# Altium PCB PCB1.PcbDoc
Units mm, origin at the board's own origin, x right, y up, seen from the top; angles counter-clockwise.
Board outline 55 x 50 mm, 2 copper layers (Top Layer, Bottom Layer); 38 components, 34 nets, 233 pads, 323 vias.
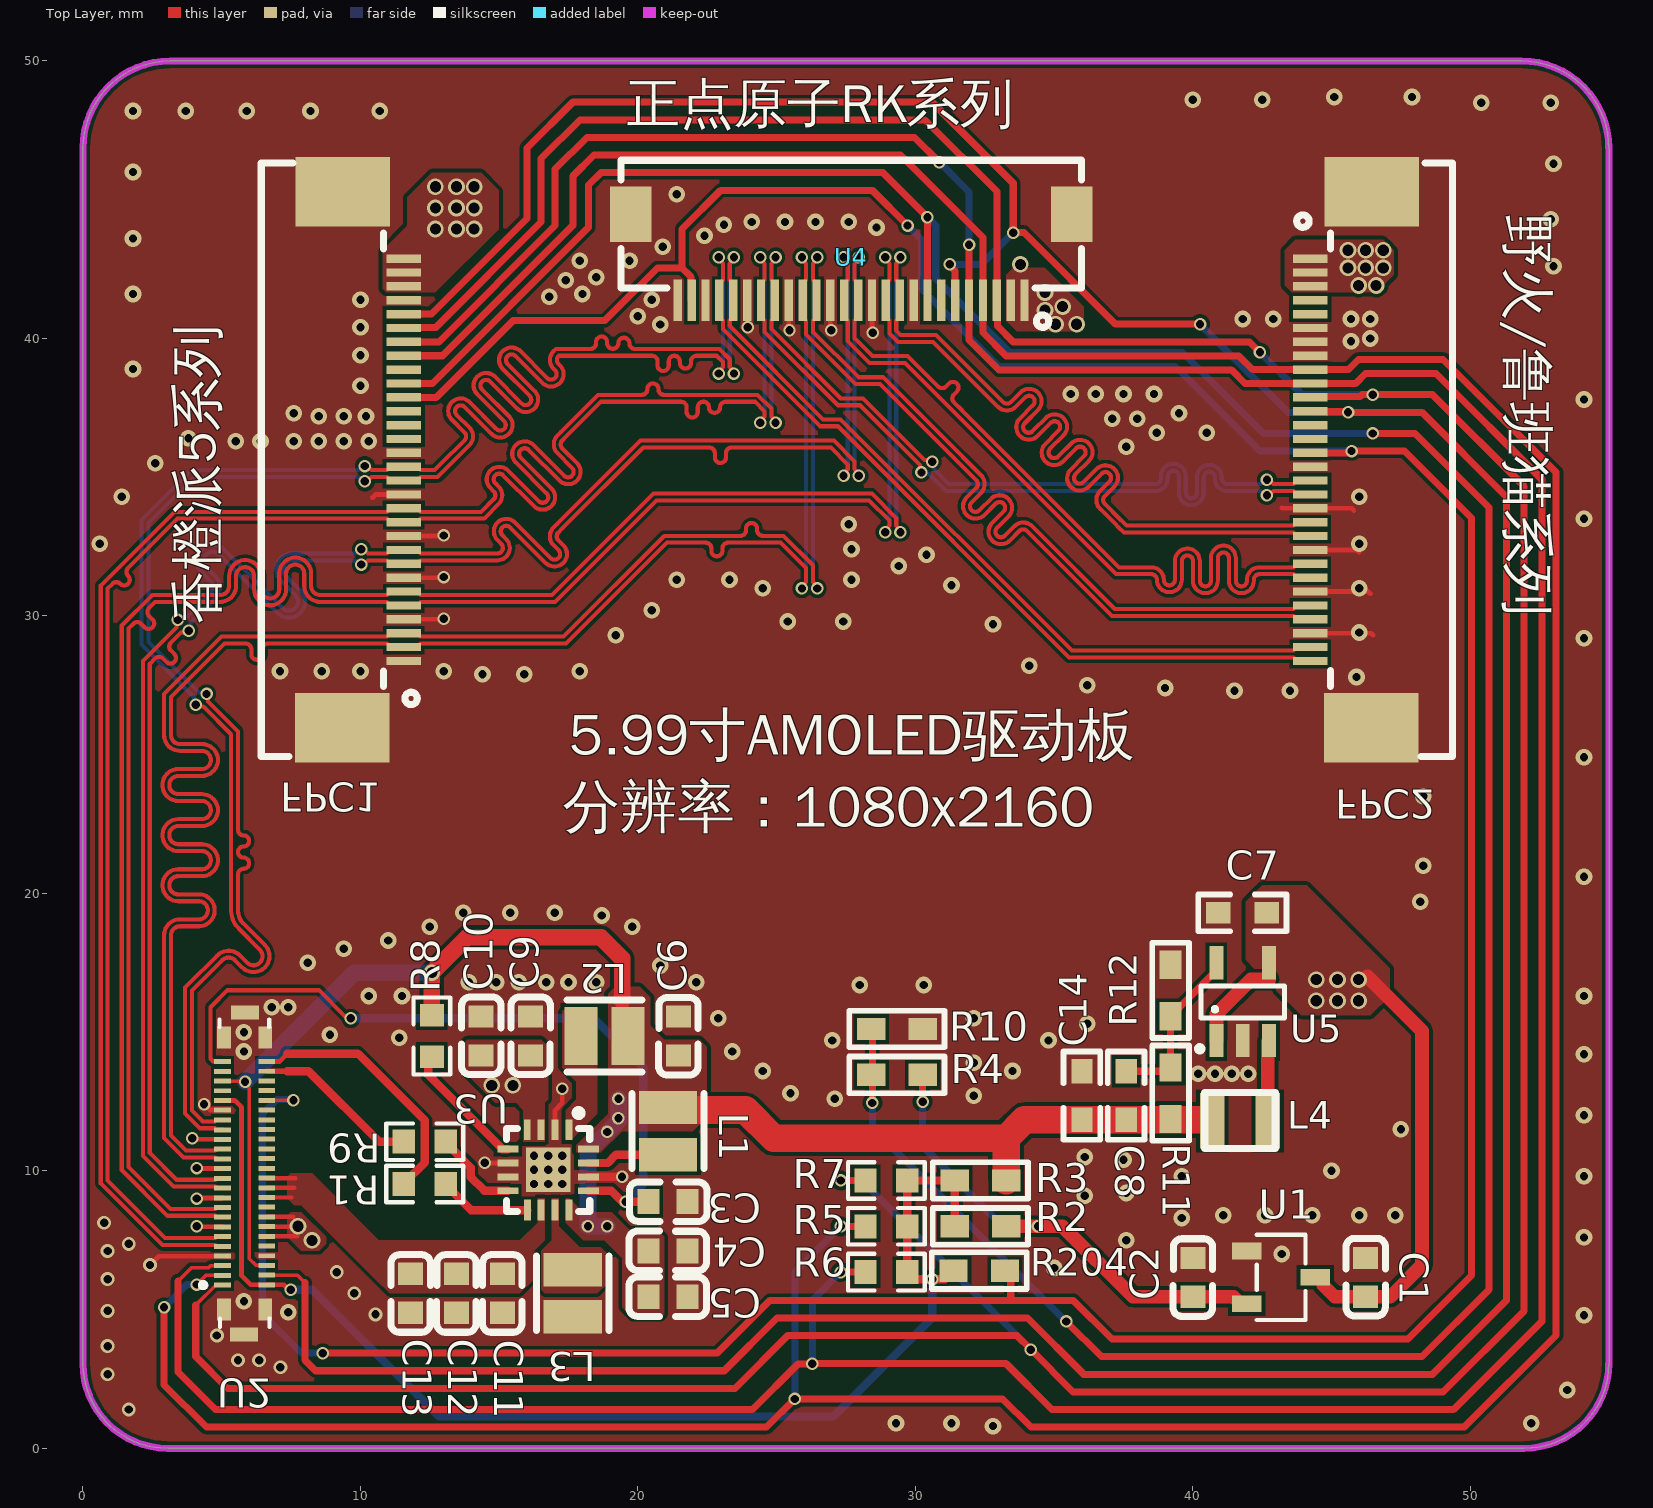
[diagram p0: Top Layer view]
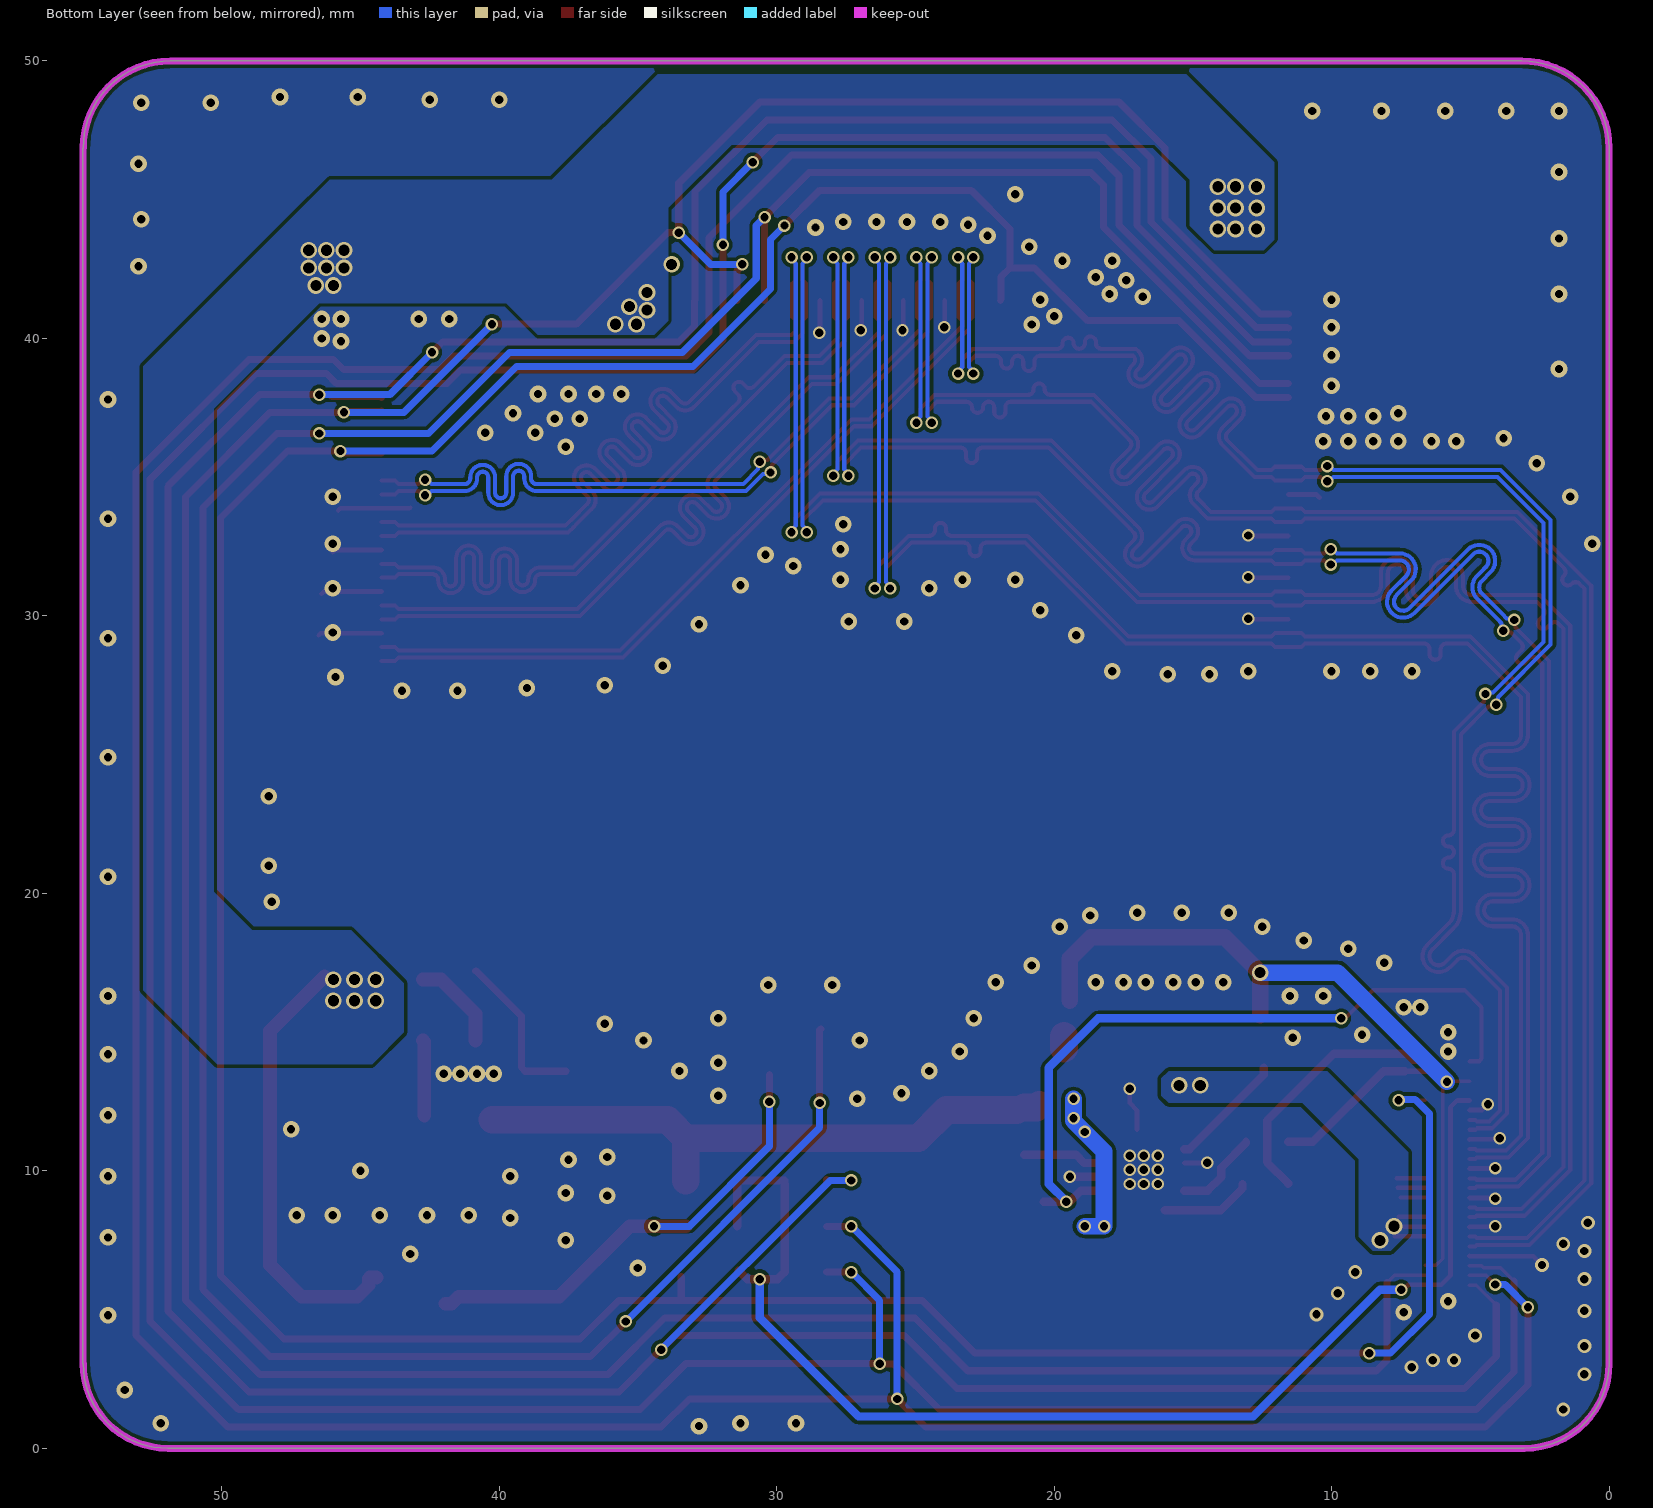
[diagram p1: Bottom Layer view, seen from below]

## Layer stack, top to bottom
Top Solder: solder mask 0.0102, Solder Resist, Dk 3.5
Top Layer: signal copper 0.0356
Dielectric 1: dielectric 0.32, FR-4, Dk 4.8
Bottom Layer: signal copper 0.0356
Bottom Solder: solder mask 0.0102, Solder Resist, Dk 3.5

## Board outline
0,3.048 ccw(c3.048,3.048) 3.048,0 51.943,0 ccw(c51.943,3.048) 54.991,3.048 55,3.048 55,46.863 54.991,46.863 ccw(c51.854,46.863) 51.854,50 3.137,50 ccw(c3.137,46.863) 0,46.863

## Design rules (kind name [scope] priority, off if disabled: settings)
Clearance Clearance_1 [InNetClass('100moh-mipi') vs InNet('GND')] p1: gap=0.3 ignorepadtopadclearanceinfootprint=FALSE
Clearance [All] p2: gap=0.127 ignorepadtopadclearanceinfootprint=FALSE
DiffPairsRouting [InDifferentialPairClass('mipi_100ohm')] p1: maxlimit=0.254 minlimit=0.101 mostfreqgap=0.101 toplayer_minwidth=0.147 toplayer_maxwidth=0.147 toplayer_prefwidth=0.147 bottomlayer_minwidth=0.147 bottomlayer_maxwidth=0.147 bottomlayer_prefwidth=0.147 maxuncoupledlength=12.7
PolygonConnect [All] p1: connectstyle=Direct reliefconductorwidth=0.254 reliefentries=4 polygonreliefangle="90 Angle" airgapwidth=0.254
RoutingVias [All] p1: holewidth=0.3 width=0.45 viastyle="Through Hole" minholewidth=0.3 minwidth=0.45 maxholewidth=0.3 maxwidth=0.45
ShortCircuit [All] p1: allowed=TRUE
SolderMaskExpansion [All] p1: expansion=0.102 istentingtop=FALSE
Width [All] p1: maxlimit=2 minlimit=0.127 preferedwidth=0.4
28 further rules are at their usual default settings.

## Components (designator, comment, footprint, x,y, rotation, side; value= is the part's Value field where it differs from the comment)
C1 "1uf" C0603 46.228,6.161 r270 top
C2 "1uf" C0603 40.005,6.161 r90 top
C3 "10uF" C0603 21.082,8.89 r180 top
C4 "10uF" C0603 21.082,7.112 r0 top
C5 "10uF" C0603 21.082,5.461 r0 top
C6 "10uF" C0603 21.463,14.859 r90 top
C7 "10uF (106)" "C 0603" 41.8,19.3 r0 top
C8 "10pF" "C 0603" 37.6,12.7 r270 top
C9 "10uF" C0603 16.129,14.859 r270 top
C10 "10uF" C0603 14.351,14.859 r270 top
C11 "10uF" C0603 15.113,5.588 r90 top
C12 "10uF" C0603 13.462,5.588 r90 top
C13 "10uF" C0603 11.811,5.588 r90 top
C14 "10uF" "C 0603" 36,12.7 r270 top
FPC1 "0.5TBQP-30P-1" FPC-SMD_30P-P0.50_0.5TBQS-30P-1 10.453,35.627 r90 top
FPC2 "0.5TBQP-30P-1" FPC-SMD_30P-P0.50_0.5TBQS-30P-1 45.339,35.627 r270 top
L1 "10uH" IND-SMD_L2.7-W2.0 21.082,11.43 r90 top
L2 "4.7uH" IND-SMD_L2.7-W2.0 18.796,14.859 r180 top
L3 "4.7uH" IND-SMD_L2.7-W2.0 17.653,5.588 r270 top
L4 "3.3uH/1.7A" 1008 41.7,11.8 r180 top
R1 "0R" R0603 12.319,9.525 r0 top
R2 "NC" "R 0603" 32.347,8.001 r180 top
R3 "0R" "R 0603" 32.347,9.652 r180 top
R4 "4.7K" "R 0603" 29.337,13.462 r180 top
R5 "NC/2.2K" R0603 28.956,8.001 r0 top
R6 "NC/2.2K" R0603 28.956,6.35 r0 top
R7 "4.7k" R0603 28.956,9.652 r0 top
R8 "10k" R0603 12.573,14.859 r270 top
R9 "0R" R0603 12.319,11.049 r0 top
R10 "10K" "R 0603" 29.337,15.113 r180 top
R11 "150KΩ" "R 0603" 39.2,12.8 r270 top
R12 "33KΩ (3302) ±1%" "R 0603" 39.2,16.5 r270 top
R204 "4.7K" "R 0603" 32.3,6.4 r180 top
U1 "XC6206P182MR(1uA)" SOT-23-3_L2.9-W1.6-P1.90-LS2.8-BR 43.18,6.161 r180 top
U2 "24-5857-048-201-829+" BTB-24-5857-048 5.842,9.906 r270 top
U3 "SGM3836AYTQ16G/TR" TQFN-16_L3.0-W3.0-P0.50-BL-EP1.7 16.764,10.033 r180 top
U4 "FPC-26P-0.5前插后压上下接" FPC-SMD_26P-P0.50_C9900017209 27.686,42.926 r0 top
U5 "SY8088AAC" SOT23-5N 41.8,16.1 r0 top

## Footprints (in the part's own frame and the unit in brackets; to place one, negate y for a bottom-side part, rotate by r counter-clockwise, add the part's x,y. Pads: shape width x height; smd on the part's side, far side on the other; paste and mask are expansions set on the pad)
1008 [mm]
  rect 0.9x2 smd: 1(-1,0) 2(1,0)
  silkscreen extent -1.27,-1.02 1.27,1
BTB-24-5857-048 [mm]
  rect 0.18x0.6 smd: 1(4.027,-0.814) 2(3.677,-0.814) 3(3.327,-0.814) 4(2.977,-0.814) 5(2.627,-0.814) 6(2.277,-0.814) 7(1.927,-0.814) 8(1.577,-0.814) 9(1.227,-0.814) 10(0.877,-0.814) 11(0.527,-0.814) 12(0.177,-0.814) 13(-0.173,-0.814) 14(-0.523,-0.814) 15(-0.873,-0.814) 16(-1.223,-0.814) 17(-1.573,-0.814) 18(-1.93,-0.814) 19(-2.28,-0.814) 20(-2.63,-0.814) 21(-2.98,-0.814) 22(-3.33,-0.814) 23(-3.68,-0.814) 24(-4.03,-0.814) 25(-4.033,0.776) 26(-3.683,0.776) 27(-3.333,0.776) 28(-2.983,0.776) 29(-2.633,0.776) 30(-2.283,0.776) 31(-1.933,0.776) 32(-1.583,0.776) 33(-1.233,0.776) 34(-0.883,0.776) 35(-0.533,0.776) 36(-0.183,0.776) 37(0.167,0.776) 38(0.517,0.776) 39(0.867,0.776) 40(1.217,0.776) 41(1.567,0.776) 42(1.917,0.776) 43(2.267,0.776) 44(2.617,0.776) 45(2.967,0.776) 46(3.317,0.776) 47(3.667,0.776) 48(4.017,0.776)
  rect 0.8x0.5 smd: 49(-4.9,0.726) 50(-4.9,-0.764) 51(4.9,-0.764) 52(4.9,0.726)
  rect 0.5x1 smd: 53(-5.8,0) 54(5.8,-0.038)
  silkscreen extent -5.55,-1.6 5.53,0.88
C0603 [mm]
  rect 0.8x0.9 smd paste+0 mask+0.051: 1(-0.7,0) 2(0.7,0)
  silkscreen extent -1.41,-0.71 1.39,0.72
"C 0603" [mil] "无极性贴片电容"
  rect 35x30 smd: 1(-35,0) 2(34,0)
  silkscreen extent -63,-26 62,26, body extent -31,-16 31,16, height 32
FPC-SMD_26P-P0.50_C9900017209 [mm]
  rect 0.3x1.5 smd paste+0 mask+0.05: 1(6.25,-1.552) 2(5.75,-1.552) 3(5.25,-1.552) 4(4.75,-1.552) 5(4.25,-1.552) 6(3.75,-1.552) 7(3.25,-1.552) 8(2.75,-1.552) 9(2.25,-1.552) 10(1.75,-1.552) 11(1.25,-1.552) 12(0.75,-1.552) 13(0.25,-1.552) 14(-0.25,-1.552) 15(-0.75,-1.552) 16(-1.25,-1.552) 17(-1.75,-1.552) 18(-2.25,-1.552) 19(-2.75,-1.552) 20(-3.25,-1.552) 21(-3.75,-1.552) 22(-4.25,-1.552) 23(-4.75,-1.552) 24(-5.25,-1.552) 25(-5.75,-1.552) 26(-6.25,-1.552)
  rect 1.5x2 smd paste+0 mask+0.05: 27(-7.95,1.552) 28(7.95,1.552)
  silkscreen extent -8.3,-2.53 8.3,3.5
FPC-SMD_30P-P0.50_0.5TBQS-30P-1 [mm]
  rect 0.3x1.25 smd: 1(-7.25,-1.104) 2(-6.75,-1.104) 3(-6.25,-1.104) 4(-5.75,-1.104) 5(-5.25,-1.104) 6(-4.75,-1.104) 7(-4.25,-1.104) 8(-3.75,-1.104) 9(-3.25,-1.104) 10(-2.75,-1.104) 11(-2.25,-1.104) 12(-1.75,-1.104) 13(-1.25,-1.104) 14(-0.75,-1.104) 15(-0.25,-1.104) 16(0.25,-1.104) 17(0.75,-1.104) 18(1.25,-1.104) 19(1.75,-1.104) 20(2.25,-1.104) 21(2.75,-1.104) 22(3.25,-1.104) 23(3.75,-1.104) 24(4.25,-1.104) 25(4.75,-1.104) 26(5.25,-1.104) 27(5.75,-1.104) 28(6.25,-1.104) 29(6.75,-1.104) 30(7.25,-1.104)
  rect 2.5x3.4 smd: 31(9.655,1.088) 32(-9.655,1.104)
  silkscreen extent -10.7,-1.6 10.7,4.03
IND-SMD_L2.7-W2.0 [mm]
  rect 1.2x2.1 smd: 1(-0.85,0) 2(0.85,0)
  silkscreen extent -1.35,-1.3 1.35,1.3
R0603 [mm]
  rect 0.806x0.864 smd paste-100 mask+0.051: 1(-0.753,0) 2(0.753,0)
  silkscreen extent -1.39,-0.66 1.39,0.66
"R 0603" [mil] "1/10W贴片电阻"
  rect 40x31.5 smd: 1(-36.5,0) 2(36.5,0)
  silkscreen extent -68,-26 68,26, body extent -31,-16 32,16, height 16
SOT23-5N [mm] "3x1.6x1.1mm(长宽高)"
  rect 0.5x1.2 smd: 1(-0.95,-1.4) 2(0,-1.4) 3(0.95,-1.4) 4(0.95,1.4) 5(-0.95,1.4)
  silkscreen extent -1.63,-1.78 1.5,0.56, body extent -1.5,-1.4 1.5,1.4, height 1.15
SOT-23-3_L2.9-W1.6-P1.90-LS2.8-BR [mm]
  rect 1.07x0.6 smd paste+0 mask+0.051: 1(1.235,-0.95) 2(1.235,0.95) 3(-1.235,0)
  silkscreen extent -0.88,-1.54 0.88,1.54
TQFN-16_L3.0-W3.0-P0.50-BL-EP1.7 [mm]
  rect 0.25x0.75 smd paste-100 mask+0.051: 1(-0.748,-1.45) 2(-0.249,-1.45) 3(0.252,-1.45) 4(0.751,-1.45) 9(0.75,1.45) 10(0.25,1.45) 11(-0.25,1.45) 12(-0.749,1.45)
  rect 0.75x0.25 smd paste-100 mask+0.051: 5(1.45,-0.75) 6(1.45,-0.25) 7(1.45,0.25) 8(1.45,0.75) 13(-1.45,0.75) 14(-1.45,0.25) 15(-1.45,-0.25) 16(-1.45,-0.75)
  rect 1.6x1.6 smd paste-100 mask+0.051: 17(0,0)
  silkscreen extent -1.5,-2.17 1.5,1.5

## Part data
C1 C2 C3 C4 C5 C6 C9 C10 C11 C12 C13: library part CAP_0603, Add into BOM=yes, Convert to PCB=yes, Device=CAP_0603, Supplier Footprint=0603, Symbol=CapAcitance
  C1 C2: Name=1uf
  C3 C4 C5 C6 C9 C10 C11 C12 C13: Name=10uF
C7 C14: library part "0603 10uF (106) 10% 10V", "贴片电容", Package=0603, SuppliersPartNumber=C19702, ComponentLink1Description=供应商链接, ComponentLink1URL=http://www.szlcsc.com/product/details_20411.html, Supplier=LC
C8: library part "0402 10pF (100) 5% 50V", "贴片电容", Package=0402, SuppliersPartNumber=C32949, ComponentLink1Description=供应商链接, ComponentLink1URL=http://www.szlcsc.com/product/details_33914.html, Supplier=LC
FPC1 FPC2 U4: JLCPCB Part Class=扩展库, Add into BOM=yes, Convert to PCB=yes, Supplier=LCSC
  FPC1 FPC2: Device=0.5TBQP-30P-1, LCSC Part Name=0.5TBQP-30P-1, Manufacturer Part=0.5TBQP-30P-1, Name=0.5TBQP-30P-1, Supplier Footprint=FPC-30P-0.5mm, Supplier Part=C3975120, Symbol=0.5TBQP-30P-1
  U4: Device=FPC-26P-0.5前插后压上下接, LCSC Part Name=FPC-26P-0.5前插后压上下接, Manufacturer Part=FPC-26P-0.5前插后压上下接, Name=FPC-26P-0.5前插后压上下接, Supplier Footprint=FPC26-0_5, Supplier Part=C9900017209, Symbol=FPC-26P-0.5前插后压上下接
L1 L2 L3: library part GNR2512PA-2R2M, "电感值:2.2uH;精度:±20%;额定电流:1.3A;", DC Resistance (DCR)=155mΩ, JLCPCB Part Class=扩展库, LCSC Part Name="2.2uH ±20%", Manufacturer=gotrend(高创科技), Rated Current=1.3A, Tolerance=±20%, Add into BOM=yes, Convert to PCB=yes, Datasheet=https://atta.szlcsc.com/upload/public/pdf/source/20171113/C142411_15105615305361115979.pdf, Device=GNR2512PA-2R2M, Manufacturer Part=GNR2512PA-2R2M, Supplier=LCSC, Supplier Footprint=SMD,2.7x2.2x1.2mm, Supplier Part=C142404, Symbol=GNR2512PA-2R2M
  L1: Name=10uH
  L2 L3: Name=4.7uH
L4: library part Inductor, "电感"
R1 R5 R6 R7 R8 R9: library part Res_0603, Add into BOM=yes, Convert to PCB=yes, Device=Res_0603, Supplier Footprint=0603, Symbol=电阻
  R1 R9: Name=0R
  R5 R6: Name=NC/2.2K
  R7: Name=4.7k
  R8: Name=10k
R2 R3 R4 R10 R204: library part R, "贴片电阻", BOM名称=贴片电阻, 学习资源=www.ooocke.com, 版权归属=源创客
R11: library part "0402 150KΩ (1503) 1%", "贴片电阻", Package=0402, SuppliersPartNumber=C25755, ComponentLink1Description=供应商链接, ComponentLink1URL=http://www.szlcsc.com/product/details_26498.html, Supplier=LC
R12: library part "0402 33KΩ (3302) 1%", "贴片电阻", Package=0402, SuppliersPartNumber=C25779, ComponentLink1Description=供应商链接, ComponentLink1URL=http://www.szlcsc.com/product/details_26522.html, Supplier=LC
U1: "输出类型:-;", JLCPCB Part Class="Extended Part", Manufacturer="TECH PUBLIC(台舟)", Add into BOM=yes, Convert to PCB=yes, Datasheet=https://atta.szlcsc.com/upload/public/pdf/source/20210427/C2827651_CB3194A7C09679308DE708B038C8109A.pdf, Device=XC6206P182MR(1uA), LCSC Part Name=XC6206P182MR(1uA), Manufacturer Part=XC6206P182MR(1uA), Name=XC6206P182MR(1uA), Output Type=-, Supplier=LCSC, Supplier Footprint=SOT-23-3L, Supplier Part=C2827651, Symbol=XC6206P182MR(1UA)
U3: JLCPCB Part Class=扩展库, Manufacturer=SGMICRO(圣邦微), Add into BOM=yes, Convert to PCB=yes, Device=SGM3836AYTQ16G/TR, LCSC Part Name=SGM3836AYTQ16G/TR, Manufacturer Part=SGM3836AYTQ16G/TR, Name=SGM3836AYTQ16G/TR, Supplier=LCSC, Supplier Footprint=TQFN-16-EP(3x3), Supplier Part=C699665, Symbol=SGM3836AYTQ16G/TR
U5: "1.5M 1A DCDC"
U2: Add into BOM=yes, Convert to PCB=yes, Device=24-5857-048-201-829+, Symbol=24-5857-048

## Via types
v1: diameter 0.6, hole 0.3, Top Layer to Bottom Layer, tented both sides, 181 vias
v2: diameter 0.45, hole 0.3, Top Layer to Bottom Layer, tented both sides, 92 vias
v3: diameter 0.6, hole 0.4, Top Layer to Bottom Layer, tented both sides, 34 vias
v4: diameter 0.5, hole 0.3, Top Layer to Bottom Layer, tented both sides, 16 vias

## Nets (pads, with @x,y where several pads share a name; then routed paths per layer and width w, separated by ;. In a path a pad name is that pad's centre, name@x,y a point inside that pad or via, vN(x,y) a via of type N, cw(c..) or ccw(c..) an arc to the next point about the centre after c; other vN are vias at no path point)
1V8: C2.1 R2.1 R4.1 U1.2 | length 17.8
  Top Layer w0.254: v2(30.264,12.484) R4.1
  Top Layer w0.5: R2.1 v2(34.417,8.001) 35.306,8.001 37.846,5.461 C2.1 41.46,5.461 41.71,5.211 U1.2
  Bottom Layer w0.254: v2(30.264,12.484) 30.264,10.884 33.147,8.001 v2(34.417,8.001)
AVDD_6.8V: C3.2 U2.24 U3.13 | length 26.8
  Top Layer w0.15: U2.24 5.013,13.951 4.679,13.951 4.591,14.039 4.591,15.894 5.207,16.51 8.509,16.51 9.468,15.551 9.513,15.551 9.652,15.413 v2@9.652,15.367
  Top Layer w0.3: U3.13 19.038,9.283 19.431,8.89 v2(19.558,8.89) C3.2
  Bottom Layer w0.3: v2(9.652,15.494) 18.415,15.494 20.193,13.716 20.193,9.525 v2(19.558,8.89)
AVDD_EN: R9.1 U2.26 | length 6
  Top Layer w0.2: U2.26 7.366,13.589
  Top Layer w0.3: 7.366,13.589 8.128,13.589 10.668,11.049 R9.1
DSI-CLKN: FPC1.8 FPC2.24 U2.12 U4.14 | length 96.8
  Top Layer w0.147: v2(3.81,29.464) 3.752,29.406 3.538,29.406 3.386,29.253 3.166,29.034 ccw(c3.308,28.892) 3.166,28.75 3.292,28.624 cw(c3.15,28.482) 3.292,28.34 cw(c3.15,28.482) 3.009,28.34 2.883,28.467 ccw(c2.741,28.325) 2.599,28.467 2.407,28.275 2.407,28.129 2.407,10.644 3.373,9.678 4.767,9.678 4.818,9.729 U2.12 ; v2(10.033,31.852) 10.115,31.852 10.266,32.003 10.956,32.003 11.082,31.877 FPC1.8 12.032,31.877 12.158,32.003 13.844,32.003 14.935,32.003 ccw(c14.935,32.452) 15.288,32.728 15.288,32.732 15.252,32.768 ; 15.252,32.769 15.113,32.907 cw(c15.255,33.049) 15.114,33.19 cw(c15.255,33.049) 15.398,33.19 16.677,31.911 ccw(c16.995,32.227) 17.311,31.909 17.312,31.91 ccw(c16.995,32.227) 17.348,32.503 17.348,32.508 17.132,32.724 cw(c17.274,32.866) 17.132,33.007 17.272,33.147 20.193,36.068 22.098,36.068 22.573,36.068 cw(c22.573,35.868) 22.773,35.868 22.773,35.713 ccw(c22.974,35.713) 23.174,35.713 23.174,35.868 cw(c23.375,35.868) 23.375,36.068 24.003,36.068 26.959,36.068 27.562,35.465 27.562,35.285 27.411,35.134 v2(27.411,35.052) ; v2(27.411,42.926) 27.411,42.844 27.562,42.693 27.562,42.099 27.436,41.974 U4.14 27.436,40.774 27.562,40.648 27.562,39.905 28.351,39.116 29.621,39.116 37.035,31.703 37.234,31.503 38.506,31.503 cw(c38.506,31.303) 38.707,31.303 ccw(c39.155,31.303) 39.604,31.303 39.604,31.979 cw(c39.804,31.979) 40.005,31.979 40.005,31.266 ccw(c40.453,31.266) 40.902,31.266 40.902,32.083 cw(c41.102,32.083) 41.303,32.083 41.303,31.266 ccw(c41.751,31.266) 42.2,31.266 42.2,31.303 cw(c42.4,31.303) 42.4,31.503 42.598,31.503 43.634,31.503 43.76,31.377 FPC2.24
  Bottom Layer w0.147: v2(3.81,29.464) 3.868,29.522 3.868,29.736 4.021,29.888 4.758,30.626 ccw(c4.351,31.032) 4.794,31.4 4.794,31.403 4.759,31.439 ; 4.758,31.439 4.603,31.594 4.444,31.754 cw(c4.675,31.985) 4.444,32.217 cw(c4.675,31.985) 4.907,32.217 7.017,30.107 ccw(c7.424,30.513) 7.831,30.106 ccw(c7.424,30.513) 7.867,30.881 7.867,30.884 7.308,31.444 cw(c7.539,31.676) 7.539,32.003 8.129,32.003 9.8,32.003 9.951,31.852 v2(10.033,31.852) ; v2(27.411,35.052) 27.411,35.134 27.562,35.285 27.562,42.693 27.411,42.844 v2(27.411,42.926)
DSI-CLKP: FPC1.9 FPC2.23 U2.11 U4.13 | length 96.8
  Top Layer w0.147: v2(3.421,29.853) 3.363,29.795 3.363,29.581 2.159,28.377 2.159,10.541 3.27,9.43 4.767,9.43 4.818,9.379 U2.11 ; v2(10.033,32.402) 10.115,32.402 10.266,32.251 10.956,32.251 11.082,32.377 FPC1.9 12.032,32.377 12.158,32.251 13.72,32.251 14.935,32.251 ccw(c14.935,32.452) 15.076,32.594 ; 15.076,32.594 14.939,32.731 cw(c15.255,33.049) 14.937,33.365 14.938,33.366 cw(c15.255,33.049) 15.531,33.402 15.536,33.402 16.853,32.085 ccw(c16.995,32.227) 17.137,32.085 ccw(c16.995,32.227) 17.136,32.369 ; 17.136,32.369 16.957,32.548 cw(c17.274,32.866) 16.957,33.183 17.097,33.322 20.09,36.316 27.061,36.316 27.81,35.567 27.81,35.285 27.961,35.134 v2(27.961,35.052) ; v2(27.961,42.926) 27.961,42.844 27.81,42.693 27.81,42.099 27.936,41.974 U4.13 27.936,40.774 27.81,40.648 27.81,40.008 28.454,39.364 29.724,39.364 30.48,38.608 30.532,38.556 30.821,38.267 ccw(c30.963,38.408) 31.105,38.267 31.213,38.375 cw(c31.355,38.233) 31.497,38.375 cw(c31.355,38.233) 31.497,38.091 31.388,37.983 ccw(c31.53,37.841) 31.388,37.7 31.672,37.416 31.724,37.364 37.035,32.053 37.337,31.751 38.506,31.751 cw(c38.506,31.303) 38.955,31.303 ccw(c39.155,31.303) 39.356,31.303 39.356,31.979 cw(c39.804,31.979) 40.253,31.979 40.253,31.266 ccw(c40.453,31.266) 40.654,31.266 40.654,32.083 cw(c41.102,32.083) 41.551,32.083 41.551,31.266 ccw(c41.751,31.266) 41.952,31.266 41.952,31.303 cw(c42.4,31.303) 42.4,31.751 42.598,31.751 43.634,31.751 43.76,31.877 FPC2.23
  Bottom Layer w0.147: v2(3.421,29.853) 3.479,29.911 3.693,29.911 3.845,30.064 4.583,30.801 ccw(c4.351,31.032) 4.582,31.265 4.268,31.578 cw(c4.675,31.985) 4.267,32.391 4.268,32.392 cw(c4.675,31.985) 5.082,32.392 6.674,30.801 7.193,30.281 ccw(c7.424,30.513) 7.656,30.282 ; 7.656,30.282 ccw(c7.424,30.513) 7.655,30.745 7.132,31.269 cw(c7.539,31.676) 7.539,32.251 7.881,32.251 9.8,32.251 9.951,32.402 v2(10.033,32.402) ; v2(27.961,35.052) 27.961,35.134 27.81,35.285 27.81,42.693 27.961,42.844 v2(27.961,42.926)
DSI-D0N: FPC1.2 FPC2.27 U2.15 U4.17 | length 97.5
  Top Layer w0.147: U2.15 4.818,10.779 4.767,10.728 3.719,10.728 3.169,11.279 3.169,17.672 3.169,18.486 cw(c3.497,18.486) 3.497,18.814 4.174,18.814 ccw(c4.174,19.389) 4.174,19.965 3.438,19.965 cw(c3.438,20.292) 3.438,20.62 4.285,20.62 ccw(c4.285,21.195) 4.285,21.771 3.438,21.771 cw(c3.438,22.098) 3.438,22.426 4.285,22.426 ccw(c4.285,23.001) 4.285,23.577 3.438,23.577 cw(c3.438,23.904) 3.438,24.232 4.285,24.232 ccw(c4.285,24.807) 4.285,25.383 3.497,25.383 cw(c3.497,25.71) 3.169,25.71 3.169,25.908 3.169,27.075 5.097,29.003 5.392,29.003 5.866,29.003 cw(c5.866,28.802) 6.067,28.802 6.067,28.62 ccw(c6.267,28.62) 6.468,28.62 6.468,28.802 cw(c6.668,28.802) 6.668,29.003 8.89,29.003 10.956,29.003 11.082,28.877 FPC1.2 12.032,28.877 12.158,29.003 17.416,29.003 21.052,32.639 21.971,32.639 22.446,32.639 cw(c22.446,32.439) 22.646,32.439 22.646,32.349 ccw(c22.847,32.349) 23.047,32.349 23.047,32.439 cw(c23.248,32.439) 23.248,32.639 24.257,32.639 25.146,32.639 26.062,31.723 26.062,31.221 25.911,31.07 v2(25.911,30.988) ; v2(25.911,42.926) 25.911,42.844 26.062,42.693 26.062,42.1 25.936,41.974 U4.17 25.936,40.774 26.062,40.647 26.062,40.135 27.843,38.354 28.732,38.354 31.465,35.621 31.569,35.518 32.191,34.895 cw(c32.05,34.752) 32.192,34.611 31.814,34.233 31.814,34.228 ccw(c32.168,33.952) 32.486,33.636 32.893,34.043 ; 32.893,34.043 cw(c33.035,33.902) 33.177,34.043 cw(c33.035,33.902) 33.177,33.76 32.732,33.315 32.732,33.31 ccw(c33.086,33.034) 32.768,32.717 ccw(c33.086,33.034) 33.404,32.718 33.744,33.058 cw(c33.886,32.917) 34.028,33.058 34.064,33.022 34.167,32.919 37.083,30.003 43.634,30.003 43.76,29.877 FPC2.27
  Bottom Layer w0.147: v2(25.911,30.988) 25.911,31.07 26.062,31.221 26.062,42.693 25.911,42.844 v2(25.911,42.926)
DSI-D0P: FPC1.3 FPC2.26 U2.14 U4.16 | length 97.4
  Top Layer w0.147: U2.14 4.818,10.429 4.767,10.48 3.617,10.48 2.921,11.176 2.921,17.672 2.921,18.486 cw(c3.497,18.486) 3.497,19.062 4.174,19.062 ccw(c4.174,19.389) 4.174,19.717 3.438,19.717 cw(c3.438,20.292) 3.438,20.868 4.285,20.868 ccw(c4.285,21.195) 4.285,21.523 3.438,21.523 cw(c3.438,22.098) 3.438,22.674 4.285,22.674 ccw(c4.285,23.001) 4.285,23.329 3.438,23.329 cw(c3.438,23.904) 3.438,24.48 4.285,24.48 ccw(c4.285,24.807) 4.285,25.135 3.497,25.135 cw(c3.497,25.71) 2.921,25.71 2.921,25.908 2.921,27.178 4.994,29.251 10.956,29.251 11.082,29.377 FPC1.3 12.032,29.377 12.158,29.251 17.313,29.251 20.949,32.887 23.622,32.887 23.696,32.887 ccw(c23.696,33.088) 23.896,33.088 23.896,33.148 cw(c24.097,33.148) 24.297,33.148 24.297,33.088 ccw(c24.498,33.088) 24.498,32.887 25.249,32.887 26.31,31.826 26.31,31.221 26.461,31.07 v2(26.461,30.988) ; v2(26.461,42.926) 26.461,42.844 26.31,42.693 26.31,42.1 26.436,41.974 U4.16 26.436,40.774 26.31,40.647 26.31,40.238 27.946,38.602 28.835,38.602 31.641,35.796 31.744,35.693 32.368,35.069 ; 32.026,33.81 cw(c32.168,33.952) 32.026,34.094 ; 32.026,33.81 ccw(c32.168,33.952) 32.31,33.81 32.754,34.255 32.759,34.255 cw(c33.035,33.902) 33.352,34.219 cw(c33.035,33.902) 33.352,33.584 32.944,33.176 ccw(c33.086,33.034) 32.943,32.893 ; 32.027,34.094 32.368,34.435 ccw(c32.05,34.752) 32.404,35.028 32.404,35.033 32.368,35.069 ; 32.944,32.892 ccw(c33.086,33.034) 33.227,32.892 33.569,33.234 cw(c33.886,32.917) 34.162,33.27 34.167,33.27 34.203,33.234 ; 34.203,33.234 34.24,33.197 34.343,33.094 37.186,30.251 43.634,30.251 43.76,30.377 FPC2.26
  Bottom Layer w0.147: v2(26.461,30.988) 26.461,31.07 26.31,31.221 26.31,42.693 26.461,42.844 v2(26.461,42.926)
DSI-D1N: FPC1.5 FPC2.21 U2.9 U4.11 | length 97.5
  Top Layer w0.147: U2.9 4.818,8.679 4.767,8.628 3.153,8.628 1.645,10.136 1.645,29.357 1.645,29.548 1.814,29.717 cw(c1.956,29.576) 2.098,29.717 2.226,29.589 ccw(c2.368,29.73) 2.51,29.589 ccw(c2.368,29.73) 2.51,29.872 2.381,30.001 cw(c2.523,30.143) 2.381,30.284 2.6,30.503 2.886,30.503 3.688,30.503 4.939,30.503 ccw(c4.939,31.079) 5.515,31.079 5.515,31.434 cw(c5.842,31.434) 6.17,31.434 6.17,30.958 ccw(c6.745,30.958) 7.321,30.958 7.321,31.524 cw(c7.648,31.524) 7.976,31.524 7.976,31.079 ccw(c8.551,31.079) 8.551,30.503 9.652,30.503 10.956,30.503 11.082,30.377 FPC1.5 12.032,30.377 12.158,30.503 17.011,30.503 20.671,34.163 28.332,34.163 29.062,33.433 29.062,33.253 28.911,33.102 v2(28.911,33.02) ; v2(28.911,42.926) 28.911,42.844 29.062,42.693 29.062,42.1 28.936,41.974 U4.11 28.936,40.774 29.062,40.647 29.062,40.183 29.367,39.878 30.637,39.878 32.841,37.674 32.945,37.571 32.981,37.534 ccw(c33.298,37.851) 33.615,37.534 33.957,37.876 ; 33.957,37.876 cw(c34.099,37.735) 34.241,37.876 cw(c34.099,37.735) 34.241,37.593 33.73,37.082 33.73,37.078 ccw(c34.084,36.801) 33.767,36.484 ccw(c34.084,36.801) 34.402,36.485 34.874,36.958 ; 34.875,36.959 cw(c35.017,36.817) 35.159,36.959 cw(c35.017,36.817) 35.159,36.675 34.648,36.164 34.648,36.16 ccw(c35.001,35.884) 34.684,35.566 ccw(c35.001,35.884) 35.32,35.568 35.792,36.04 ; 35.793,36.041 cw(c35.935,35.899) 36.076,36.041 cw(c35.935,35.899) 36.076,35.757 35.566,35.247 35.566,35.242 ccw(c35.919,34.966) 35.602,34.649 ccw(c35.919,34.966) 36.237,34.65 36.71,35.122 ; 36.711,35.123 cw(c36.852,34.981) 36.994,35.123 cw(c36.852,34.981) 36.994,34.839 36.652,34.497 ccw(c36.969,34.18) 36.652,33.863 37.208,33.308 37.311,33.204 37.512,33.003 43.634,33.003 43.76,32.877 FPC2.21
  Bottom Layer w0.147: v2(28.911,33.02) 28.911,33.102 29.062,33.253 29.062,42.693 28.911,42.844 v2(28.911,42.926)
DSI-D1P: FPC1.6 FPC2.20 U2.8 U4.10 | length 97.5
  Top Layer w0.147: U2.8 4.818,8.329 4.767,8.38 3.05,8.38 1.397,10.033 1.397,29.651 2.497,30.751 3.688,30.751 4.939,30.751 ccw(c4.939,31.079) 5.267,31.079 5.267,31.434 cw(c5.842,31.434) 6.418,31.434 6.418,30.958 ccw(c6.745,30.958) 7.073,30.958 7.073,31.524 cw(c7.648,31.524) 8.224,31.524 8.224,31.079 ccw(c8.551,31.079) 8.551,30.751 9.652,30.751 10.956,30.751 11.082,30.877 FPC1.6 12.032,30.877 12.158,30.751 16.908,30.751 20.568,34.411 28.434,34.411 29.31,33.535 29.31,33.253 29.461,33.102 v2(29.461,33.02) ; v2(29.461,42.926) 29.461,42.844 29.31,42.693 29.31,42.1 29.436,41.974 U4.10 29.436,40.774 29.31,40.647 29.31,40.286 29.47,40.126 30.74,40.126 33.017,37.849 33.12,37.746 33.156,37.71 ccw(c33.298,37.851) 33.44,37.71 33.818,38.088 33.823,38.088 cw(c34.099,37.735) 34.416,38.052 cw(c34.099,37.735) 34.416,37.417 33.942,36.944 ; 33.942,36.943 ccw(c34.084,36.801) 33.942,36.66 ccw(c34.084,36.801) 34.225,36.66 34.736,37.17 34.741,37.17 cw(c35.017,36.817) 35.334,37.134 cw(c35.017,36.817) 35.334,36.5 34.86,36.026 ; 34.859,35.742 cw(c35.001,35.884) 34.86,36.025 ; 34.86,35.741 ccw(c35.001,35.884) 35.143,35.742 35.654,36.252 35.659,36.252 cw(c35.935,35.899) 36.252,36.216 cw(c35.935,35.899) 36.252,35.582 35.778,35.108 ; 35.777,34.824 cw(c35.919,34.966) 35.778,35.108 ; 35.778,34.824 ccw(c35.919,34.966) 36.061,34.824 36.572,35.335 36.576,35.335 cw(c36.852,34.981) 37.17,35.298 cw(c36.852,34.981) 37.17,34.664 36.828,34.322 ccw(c36.969,34.18) 36.828,34.038 37.383,33.483 37.486,33.38 37.615,33.251 43.634,33.251 43.76,33.377 FPC2.20
  Bottom Layer w0.147: v2(29.461,33.02) 29.461,33.102 29.31,33.253 29.31,42.693 29.461,42.844 v2(29.461,42.926)
DSI-D2N: FPC1.11 FPC2.18 U2.6 U4.20 | length 96.8
  Top Layer w0.147: U2.6 4.818,7.629 4.767,7.578 2.963,7.578 0.889,9.652 0.889,30.797 0.889,30.988 1.058,31.157 cw(c1.2,31.016) 1.342,31.157 ccw(c1.484,31.299) 1.626,31.157 ccw(c1.484,31.299) 1.626,31.441 cw(c1.767,31.583) 1.625,31.724 2.147,32.246 3.404,33.503 10.956,33.503 11.082,33.377 FPC1.11 12.032,33.377 12.158,33.503 14.453,33.503 14.485,33.535 14.979,34.029 ccw(c14.662,34.346) 15.015,34.622 15.015,34.627 14.98,34.663 ; 14.979,34.663 14.858,34.784 cw(c15,34.926) 14.858,35.067 cw(c15,34.926) 15.142,35.067 16.249,33.96 ; 16.06,35.985 17.167,34.878 ccw(c17.485,35.195) 17.801,34.876 17.802,34.877 ccw(c17.485,35.195) 17.838,35.471 17.838,35.475 17.274,36.04 cw(c17.415,36.182) 17.274,36.324 17.413,36.463 18.669,37.719 21.082,37.719 21.557,37.719 cw(c21.557,37.519) 21.757,37.519 21.757,37.35 ccw(c21.958,37.35) 22.158,37.35 22.158,37.519 cw(c22.359,37.519) 22.559,37.519 ccw(c22.76,37.518) 22.96,37.518 cw(c23.161,37.519) 23.161,37.719 23.969,37.719 24.213,37.719 24.562,37.37 24.562,37.19 24.411,37.039 v2(24.411,36.957) ; 16.06,35.985 ccw(c15.918,35.843) 15.776,35.985 ccw(c15.918,35.843) 15.776,35.702 16.92,34.558 16.92,34.553 cw(c16.567,34.277) 16.884,33.96 16.883,33.959 cw(c16.567,34.277) 16.249,33.96 ; v2(24.411,42.926) 24.411,42.844 24.562,42.693 24.562,42.099 24.436,41.974 U4.20 24.436,40.774 24.562,40.648 24.562,40.238 27.208,37.592 28.011,37.592 30.16,35.443 30.16,35.229 v2(30.218,35.171) ; v2(42.672,34.352) 42.754,34.352 42.905,34.503 43.634,34.503 43.76,34.377 FPC2.18
  Bottom Layer w0.147: v2(24.411,36.957) 24.411,37.039 24.562,37.19 24.562,42.693 24.411,42.844 v2(24.411,42.926) ; v2(30.218,35.171) 30.276,35.113 30.49,35.113 31.1,34.503 38.45,34.503 38.648,34.503 ccw(c38.648,34.952) 39.096,34.952 39.096,35.033 cw(c39.297,35.033) 39.497,35.033 39.497,34.439 ccw(c39.946,34.439) 40.394,34.439 40.394,34.996 cw(c40.595,34.996) 40.795,34.996 40.795,34.952 ccw(c41.244,34.952) 41.244,34.503 41.994,34.503 42.439,34.503 42.59,34.352 v2(42.672,34.352)
DSI-D2P: FPC1.12 FPC2.17 U2.5 U4.19 | length 96.4
  Top Layer w0.147: U2.5 4.818,7.279 4.767,7.33 2.86,7.33 0.641,9.549 0.641,31.091 3.301,33.751 10.956,33.751 11.082,33.877 FPC1.12 12.032,33.877 12.158,33.751 14.269,33.751 14.35,33.751 14.804,34.204 ccw(c14.662,34.346) 14.803,34.488 14.684,34.608 cw(c15,34.926) 14.682,35.242 14.683,35.243 cw(c15,34.926) 15.276,35.279 15.281,35.279 16.425,34.135 ccw(c16.567,34.277) 16.709,34.135 ccw(c16.567,34.277) 16.708,34.419 ; 16.708,34.419 15.602,35.526 cw(c15.918,35.843) 15.6,36.16 15.601,36.161 cw(c15.918,35.843) 16.194,36.197 16.199,36.197 17.343,35.052 ccw(c17.485,35.195) 17.626,35.053 ccw(c17.485,35.195) 17.626,35.337 17.098,35.865 cw(c17.415,36.182) 17.098,36.499 17.238,36.639 18.566,37.967 20.066,37.967 20.14,37.967 ccw(c20.14,38.168) 20.34,38.168 20.34,38.179 cw(c20.541,38.179) 20.741,38.179 20.741,38.168 ccw(c20.942,38.168) 20.942,37.967 21.717,37.967 24.315,37.967 24.81,37.472 24.81,37.19 24.961,37.039 v2(24.961,36.957) ; v2(24.961,42.926) 24.961,42.844 24.81,42.693 24.81,42.099 24.936,41.974 U4.19 24.936,40.774 24.81,40.648 24.81,40.341 27.311,37.84 28.113,37.84 30.335,35.618 30.549,35.618 v2(30.607,35.56) ; v2(42.672,34.902) 42.754,34.902 42.905,34.751 43.634,34.751 43.76,34.877 FPC2.17
  Bottom Layer w0.147: v2(24.961,36.957) 24.961,37.039 24.81,37.19 24.81,42.693 24.961,42.844 v2(24.961,42.926) ; v2(30.607,35.56) 30.665,35.502 30.665,35.288 31.202,34.751 38.45,34.751 38.648,34.751 ccw(c38.648,34.952) 38.848,34.952 38.848,35.033 cw(c39.297,35.033) 39.745,35.033 39.745,34.439 ccw(c39.946,34.439) 40.146,34.439 40.146,34.996 cw(c40.595,34.996) 41.043,34.996 41.043,34.952 ccw(c41.244,34.952) 41.244,34.751 41.994,34.751 42.439,34.751 42.59,34.902 v2(42.672,34.902)
DSI-D3N: FPC1.14 FPC2.30 U2.18 U4.23 | length 96.5
  Top Layer w0.147: v2(4.453,27.186) 4.511,27.128 4.511,26.914 5.588,25.837 5.588,24.003 5.588,22.364 5.588,22.29 ccw(c5.788,22.29) 5.788,22.09 cw(c5.789,21.889) 5.789,21.689 ccw(c5.789,21.488) 5.789,21.288 cw(c5.789,21.087) 5.789,20.887 ccw(c5.788,20.686) 5.588,20.686 5.588,19.685 5.588,19.53 5.588,19.376 ccw(c6.235,19.375) 5.777,18.918 6.553,18.142 cw(c6.146,17.735) 6.553,17.329 cw(c6.146,17.735) 5.739,17.329 5.48,17.588 ; U2.18 4.818,11.836 4.764,11.782 4.317,11.782 3.931,12.168 3.931,16.504 5.016,17.589 cw(c5.247,17.357) 5.479,17.588 ; v2(10.16,34.852) 10.242,34.852 10.393,35.003 10.956,35.003 11.082,34.877 FPC1.14 12.032,34.877 12.158,35.003 12.778,35.003 13.085,35.31 13.927,36.152 ccw(c13.61,36.47) 13.927,36.787 13.468,37.246 cw(c13.61,37.388) 13.468,37.529 cw(c13.61,37.388) 13.752,37.529 ; 13.753,37.529 14.719,36.562 ccw(c15.037,36.879) 15.354,36.562 ccw(c15.037,36.879) 15.39,37.155 15.39,37.16 14.386,38.164 cw(c14.528,38.305) 14.386,38.447 cw(c14.528,38.305) 14.67,38.447 15.636,37.48 ccw(c15.954,37.797) 16.272,37.48 ccw(c15.954,37.797) 16.308,38.073 16.308,38.077 15.304,39.081 cw(c15.446,39.223) 15.304,39.365 cw(c15.446,39.223) 15.588,39.365 ; 15.588,39.364 16.554,38.398 ccw(c16.872,38.714) 17.189,38.397 ccw(c16.872,38.714) 17.226,38.991 17.226,38.995 17.14,39.081 cw(c17.282,39.223) 17.14,39.365 17.151,39.376 17.867,39.376 20.035,39.376 20.51,39.376 cw(c20.51,39.175) 20.71,39.175 20.71,39.027 ccw(c20.911,39.027) 21.111,39.027 21.111,39.175 cw(c21.312,39.175) 21.512,39.175 21.512,39.116 ccw(c21.713,39.116) 21.913,39.116 21.913,39.175 cw(c22.114,39.175) 22.114,39.376 22.794,39.376 22.834,39.376 23.062,39.148 23.062,38.968 22.911,38.817 v2(22.911,38.735) ; v2(22.911,42.926) 22.911,42.844 23.062,42.693 23.062,42.1 22.936,41.974 U4.23 22.936,40.774 23.062,40.647 23.062,40.341 26.567,36.836 27.202,36.836 35.535,28.503 43.634,28.503 43.76,28.377 FPC2.30
  Bottom Layer w0.147: v2(4.453,27.186) 4.395,27.244 4.181,27.244 2.359,29.067 2.359,33.347 4.015,35.003 9.927,35.003 10.078,34.852 v2(10.16,34.852) ; v2(22.911,38.735) 22.911,38.817 23.062,38.968 23.062,42.693 22.911,42.844 v2(22.911,42.926)
DSI-D3P: FPC1.15 FPC2.29 U2.17 U4.22 | length 96.1
  Top Layer w0.147: v2(4.064,26.797) 4.122,26.739 4.336,26.739 5.34,25.735 5.34,19.778 5.34,19.376 ccw(c6.235,19.375) 5.601,18.743 ; U2.17 4.818,11.479 4.764,11.534 4.214,11.534 3.683,12.065 3.683,16.607 3.756,16.679 4.84,17.764 cw(c5.247,17.357) 5.614,17.8 5.618,17.8 5.654,17.764 ; 5.601,18.743 6.377,17.967 cw(c6.146,17.735) 6.377,17.504 cw(c6.146,17.735) 5.914,17.504 5.654,17.764 ; v2(10.16,35.402) 10.242,35.402 10.393,35.251 10.956,35.251 11.082,35.377 FPC1.15 12.032,35.377 12.158,35.251 12.675,35.251 12.91,35.485 13.752,36.328 ccw(c13.61,36.47) 13.752,36.611 13.294,37.07 cw(c13.61,37.388) 13.293,37.705 cw(c13.61,37.388) 13.886,37.741 13.891,37.741 14.895,36.737 ccw(c15.037,36.879) 15.178,36.737 ccw(c15.037,36.879) 15.178,37.021 ; 15.178,37.021 14.211,37.988 cw(c14.528,38.305) 14.211,38.623 cw(c14.528,38.305) 14.804,38.659 14.809,38.659 15.813,37.655 ccw(c15.954,37.797) 16.096,37.939 15.129,38.905 cw(c15.446,39.223) 15.129,39.54 cw(c15.446,39.223) 15.722,39.577 15.726,39.577 16.73,38.573 ccw(c16.872,38.714) 17.014,38.573 ccw(c16.872,38.714) 17.014,38.856 ; 17.013,38.857 16.965,38.905 cw(c17.282,39.223) 16.964,39.54 17.048,39.624 17.619,39.624 18.217,39.624 18.291,39.624 ccw(c18.291,39.824) 18.491,39.824 18.491,39.869 cw(c18.692,39.869) 18.892,39.869 18.892,39.824 ccw(c19.093,39.824) 19.293,39.824 cw(c19.494,39.825) 19.694,39.825 ccw(c19.895,39.824) 19.895,39.624 21.082,39.624 22.936,39.624 23.31,39.25 23.31,38.968 23.461,38.817 v2(23.461,38.735) ; v2(23.461,42.926) 23.461,42.844 23.31,42.693 23.31,42.1 23.436,41.974 U4.22 23.436,40.774 23.31,40.647 23.31,40.444 26.67,37.084 27.305,37.084 35.638,28.751 43.634,28.751 43.76,28.877 FPC2.29
  Bottom Layer w0.147: v2(4.064,26.797) 4.006,26.855 4.006,27.069 2.111,28.964 2.111,33.449 3.912,35.251 9.927,35.251 10.078,35.402 v2(10.16,35.402) ; v2(23.461,38.735) 23.461,38.817 23.31,38.968 23.31,42.693 23.461,42.844 v2(23.461,42.926)
ELVDD: C9.2 C10.2 U2.41 U2.42 U2.43 U3.3 U3.4 | length 3.1
  Top Layer w0.16: U2.43 7.728,7.639 ; U2.42 v3@7.608,7.989 ; U2.41 7.577,8.339
  other v3: 8.255,7.493 7.747,8.001 14.732,13.081 15.494,13.081
ELVSS: C11.2 C12.2 C13.2 U2.37 U2.38 U2.39 U3.10 | length 2.9
  Top Layer w0.16: U2.39 7.515,9.039 ; U2.38 7.611,9.389 ; U2.37 7.66,9.739
GND: C1.1 C2.2 C3.1 C4.2 C5.2 C6.2 C7.1 C9.1 C10.1 C11.1 C12.1 C13.1 C14.1 FPC1.1 FPC1.4 FPC1.7 FPC1.10 FPC1.13 FPC1.16 FPC1.27 FPC1.31 FPC1.32 FPC2.6 FPC2.7 FPC2.8 FPC2.16 FPC2.19 FPC2.22 FPC2.25 FPC2.28 FPC2.31 FPC2.32 L3.2 R10.1 R12.1 U1.1 U2.4 U2.7 U2.10 U2.13 U2.16 U2.19 U2.45 U2.49 U2.50 U2.51 U2.52 U2.53 U2.54 U3.2 U3.6 U3.7 U3.14 U3.17 U4.9 U4.12 U4.15 U4.18 U4.21 U4.24 U4.26 U4.27 U4.28 U5.2 | length 30
  Top Layer w0.17: v4(2.413,6.604) 2.709,6.9 2.73,6.921 5.028,6.921 U2.4 ; v2@3.9,11.1 3.934,11.134 5.023,11.134 U2.16 ; v2@4,8 4.016,7.984 5.023,7.984 U2.7 ; v2(4.1,9) 4.124,9.024 5.023,9.024 U2.10 ; v2(4.1,10.1) 4.116,10.084 5.023,10.084 U2.13 ; v2@4.39,12.5 4.39,12.41 4.573,12.227 4.573,12.191 5.023,12.191 U2.19 ; 10.435,34.265 10.548,34.377 FPC1.13 ; FPC1.4 12.977,29.877 v2(13,29.9) ; FPC1.7 12.977,31.377 v2(13,31.4) ; FPC1.10 12.977,32.877 v2(13,32.9) ; v2@14.482,10.283 U3.6 ; U3.2 17.013,12.187 17.272,12.446 v2(17.272,12.954) ; U4.21 23.936,40.564 v2@24,40.5 ; U4.18 25.436,40.364 v2@25.5,40.3 ; U4.15 26.936,40.364 v2@27,40.3 ; U4.12 28.436,40.228 v2(28.464,40.201) ; 43.2,33.9 43.223,33.877 FPC2.19 45.723,33.877 45.8,33.8 ; FPC2.28 46.423,29.377 46.5,29.3 ; FPC2.25 46.323,30.877 46.4,30.8 ; FPC2.22 45.923,32.377 46,32.3
  Top Layer w0.3: U3.14 v2(19.427,9.783)
  other v1: 32.8,0.8 29.3,0.9 31.3,0.9 52.2,0.9 53.5,2.1 54.1,4.8 7.4,4.9 5.8,5.3 35,6.5 43.2,7 37.6,7.5 54.1,7.6 39.6,8.3 41.1,8.4 42.6,8.4 44.3,8.4 46,8.4 47.3,8.4 36.1,9.1 37.6,9.2 39.6,9.8 54.1,9.8 45,10 37.5,10.4 36.1,10.5 47.5,11.5 54.1,12 27.1,12.6 32.1,12.7 25.5,12.8 40.2,13.5 40.8,13.5 41.4,13.5 42,13.5 24.5,13.6 33.5,13.6 32.1,13.9 54.1,14.2 5.8,14.3 23.4,14.3 27,14.7 34.8,14.7 11.4,14.8 8.9,14.9 5.8,15 36.2,15.3 22.9,15.5 32.1,15.5 6.8,15.9 7.4,15.9 10.3,16.3 11.5,16.3 54.1,16.3 28,16.7 30.3,16.7 13.9,16.8 14.9,16.8 15.7,16.8 16.7,16.8 17.5,16.8 18.5,16.8 22.1,16.8 20.8,17.4 8.1,17.5 9.4,18 11,18.3 12.5,18.8 19.8,18.8 18.7,19.2 13.7,19.3 15.4,19.3 17,19.3 48.2,19.7 54.1,20.6 48.3,21 48.3,23.5 54.1,24.9 41.5,27.3 43.5,27.3 39,27.4 36.2,27.5 45.9,27.8 14.4,27.9 15.9,27.9 7.1,28 8.6,28 10,28 13,28 17.9,28 34.1,28.2 54.1,29.2 19.2,29.3 46,29.4 32.8,29.7 25.4,29.8 27.4,29.8 20.5,30.2 24.5,31 46,31 31.3,31.1 21.4,31.3 23.3,31.3 27.7,31.3 29.4,31.8 30.4,32.2 27.7,32.4 0.6,32.6 46,32.6 27.6,33.3 54.1,33.5 1.4,34.3 46,34.3 2.6,35.5 37.6,36.1 5.5,36.3 6.4,36.3 7.6,36.3 8.5,36.3 9.4,36.3 10.3,36.3 3.8,36.4 38.7,36.6 40.5,36.6 37.1,37.1 38,37.1 8.5,37.2 9.4,37.2 10.2,37.2 7.6,37.3 39.5,37.3 54.1,37.8 35.6,38 36.5,38 37.5,38 38.6,38 10,38.3 1.8,38.9 10,39.4 45.7,39.9 46.4,40 10,40.4 20.8,40.5 41.8,40.7 42.9,40.7 45.7,40.7 46.4,40.7 20,40.8 10,41.4 20.5,41.4 16.8,41.5 1.8,41.6 18,41.6 17.4,42.1 18.5,42.2 53,42.6 17.9,42.8 19.7,42.8 20.9,43.3 1.8,43.6 22.4,43.7 28.6,44 23.1,44.1 24.1,44.2 25.3,44.2 26.4,44.2 27.6,44.2 52.9,44.3 21.4,45.2 1.8,46 53,46.3 1.8,48.2 3.7,48.2 5.9,48.2 8.2,48.2 10.7,48.2 50.4,48.5 52.9,48.5 40,48.6 42.5,48.6 45.1,48.7 47.9,48.7
  other v2: 4.1,8 16.256,9.525 16.764,9.525 17.272,9.525 16.256,10.033 16.764,10.033 17.272,10.033 14.478,10.287 16.256,10.541 16.764,10.541 17.272,10.541 3.937,11.176 4.364,12.401 25.464,40.301 26.964,40.301 23.964,40.401
  other v4: 1.651,1.397 0.889,2.667 7.112,2.921 5.588,3.175 6.35,3.175 0.889,3.683 4.826,4.064 10.541,4.826 0.889,4.953 9.779,5.588 0.889,6.096 9.144,6.35 0.889,7.112 1.651,7.366 0.762,8.128
LCD_ID: FPC1.21 R4.2 R10.2 U4.8 | length 110.7
  Top Layer w0.254: FPC1.21 12.596,38.377 18.224,44.005 18.224,45.529 18.669,45.974 28.829,45.974 v2(30.436,44.367) U4.8 ; R10.2 28.448,15.075 v2(28.448,12.446) ; v2(35.433,4.572) 36.703,3.302 48.26,3.302 50.673,5.715 50.673,33.909 48.006,36.576 v2(46.482,36.576)
  Bottom Layer w0.254: v2(28.448,12.446) 28.448,11.557 v2(35.433,4.572) ; v2(30.436,44.367) 30.734,44.069 30.734,42.164 33.401,39.497 39.624,39.497 42.545,36.576 v2(46.482,36.576)
NetC8_1: C8.1 R11.1 R12.2 U5.5 | length 5.8
  Top Layer w0.254: C8.1 39.062,13.589 R11.1 R12.2 40.827,17.2 U5.5@40.85,17.2
NetL1_1: L1.1 U3.15 | length 3
  Top Layer w0.3: U3.15 18.919,10.283 19.216,10.58 L1.1
NetL2_2: L2.2 U3.1
NetL3_1: L3.1 U3.11
NetL4_1: L4.1 U5.3 | length 2.7
  Top Layer w0.5: L4.1@42.7,12 42.7,14.65 U5.3
NetR1_2: R1.2 U3.9 | length 3.3
  Top Layer w0.3: R1.2@13.208,9.525 13.208,9.361 13.986,8.583 U3.9
NetR8_2: R8.2 U3.5 | length 4.2
  Top Layer w0.3: R8.2@12.446,13.716 12.446,13.451 15.114,10.783 U3.5
NetR9_2: R9.2 U3.8 | length 3.2
  Top Layer w0.3: R9.2@13.081,11.049 13.081,11.012 13.97,10.123 13.97,9.779 14.466,9.283 U3.8
RESX: FPC1.20 FPC2.15 R204.1 U2.29 U4.25 | length 135.3
  Top Layer w0.127: U2.29 v2(7.586,12.539)
  Top Layer w0.254: v2(8.636,3.429) 22.86,3.429 24.765,5.334 33.437,5.334 ; FPC1.20 12.731,37.877 15.494,40.64 18.796,40.64 20.701,42.545 21.59,42.545 ; U4.25 21.913,41.397 21.913,42.222 21.59,42.545 ; v2(29.718,44.069) 28.448,45.339 22.987,45.339 21.59,43.942 21.59,42.545 ; R204.1@33.437,6.19 33.437,5.334 ; FPC2.15 45.603,35.877 45.667,35.941 v2(45.72,35.941) 47.625,35.941 50.038,33.528 50.038,6.223 47.752,3.937 37.084,3.937 35.687,5.334 33.437,5.334
  Bottom Layer w0.254: v2@7.62,12.573 6.985,12.573 6.477,12.065 6.477,4.826 7.874,3.429 v2(8.636,3.429) ; v2(29.718,44.069) 30.226,43.561 30.226,41.783 33.02,38.989 39.37,38.989 42.418,35.941 v2(45.72,35.941)
SWIRE: R1.1 U2.25 | length 9.4
  Top Layer w0.17: U2.25 7.081,13.939 7.366,14.224
  Top Layer w0.3: 7.366,14.224 9.906,14.224 12.319,11.811 12.319,10.307 11.566,9.554 R1.1
TP-INT: FPC1.25 FPC2.11 R7.1 U2.1 U4.3 | length 149.8
  Top Layer w0.127: 4.064,5.164 4.779,5.879 U2.1
  Top Layer w0.254: 4.064,5.164 4.064,3.302 5.207,2.159 23.495,2.159 25.4,4.064 33.655,4.064 v2(34.163,3.556) 35.687,2.032 49.022,2.032 51.943,4.953 51.943,34.671 48.641,37.973 v2(46.482,37.973) 46.101,37.973 46.028,37.9 44.258,37.9 FPC2.11 ; FPC1.25 11.58,40.4 12.714,40.4 16.51,44.196 16.51,46.482 17.907,47.879 30.353,47.879 32.936,45.296 U4.3 32.959,41.351 32.959,40.447 33.528,39.878 42.037,39.878 v2(42.418,39.497) ; v2(27.305,9.652) R7.1 R7.1@28.203,9.681
  Bottom Layer w0.254: v2(27.305,9.652) 28.067,9.652 v2(34.163,3.556) ; v2(42.418,39.497) 43.942,37.973 v2(46.482,37.973)
TP-SCL: FPC1.23 FPC2.9 R5.1 U2.2 U4.4 | length 149.9
  Top Layer w0.127: v2(4.1,5.9) 4.429,6.229 U2.2
  Top Layer w0.254: v2(2.921,5.08) 2.921,2.286 4.445,0.762 24.638,0.762 v2(25.654,1.778) 33.147,1.778 34.163,0.762 49.784,0.762 53.086,4.064 53.086,35.179 49.022,39.243 45.974,39.243 45.608,38.877 FPC2.9 42.149,38.877 41.656,39.37 33.274,39.37 32.436,40.208 U4.4 32.436,43.637 29.464,46.609 18.415,46.609 17.653,45.847 17.653,44.069 12.961,39.377 FPC1.23 ; v2(27.305,8.001) R5.1
  Bottom Layer w0.254: v2(2.921,5.08) 3.741,5.9 v2(4.1,5.9) ; v2(25.654,1.778) 25.654,6.35 v2(27.305,8.001)
TP-SDA: FPC1.24 FPC2.10 R6.1 U2.3 U4.5 | length 146.4
  Top Layer w0.127: 3.429,6.029 3.9,6.5 4.518,6.5 4.597,6.579 U2.3
  Top Layer w0.254: 3.429,6.029 3.429,2.745 4.777,1.397 24.13,1.397 25.763,3.03 26.271,3.03 v2(26.289,3.048) 33.274,3.048 34.925,1.397 49.403,1.397 52.578,4.572 52.578,34.925 48.768,38.735 46.228,38.735 45.87,38.377 FPC2.10 41.887,38.377 41.402,38.862 33.02,38.862 31.936,39.946 U4.5 v2(31.936,43.375) ; FPC1.24 12.826,39.877 17.018,44.069 17.018,46.101 18.161,47.244 29.972,47.244 v2(30.861,46.355) ; v2(27.305,6.35) R6.1
  Bottom Layer w0.254: v2(26.289,3.048) 26.289,5.334 v2(27.305,6.35) ; v2@30.797,46.419 v2(30.861,46.355) 31.936,45.28 v2(31.936,43.375)
TSP_AVDD_3.3V: C4.1 C5.1 C6.1 C8.2 C14.2 L1.2 L2.1 L4.2 R3.1 R8.1 R11.2 U2.22 U2.46 U3.12 U3.16 | length 55.1
  Top Layer w0.127: U2.22 5.042,13.222 v2@5.828,13.222 ; v2(5.842,13.208) v2@5.828,13.222 ; U2.46 6.603,6.604 6.223,6.604 5.991,6.837 5.991,12.972 5.828,13.135 v2@5.828,13.222
  Top Layer w0.6: R8.1 v3(12.573,17.145) 13.843,18.415 18.669,18.415 19.431,17.653 19.431,16.129
  Top Layer w1: L2.1@19.646,14.409 L2.1 ; L1.2@20.532,12.38 20.632,12.28 L1.2 ; L1.2@21.336,12.192 23.876,12.192 24.892,11.176 33.274,11.176 ; R3.1 33.274,11.176 ; L4.2@40.25,11.838 39.2,11.838 C8.2 C14.2 33.936,11.838 33.274,11.176
  Bottom Layer w0.6: v2(5.842,13.208) 9.779,17.145 v3(12.573,17.145) ; v2(18.9,8) v2(18.2,8) 18.2,10.7 v2(18.9,11.4) 19.3,11.8 v2(19.3,11.9) v2(19.3,12.6)
TSP_DVDD: R2.2 R3.2 R5.2 R6.2 R7.2 R204.2 U2.20 U2.48 | length 45.2
  Top Layer w0.17: U2.20 5.471,12.536 5.715,12.292 5.715,6.223 6.049,5.889 U2.48 7.243,5.889 7.493,5.639 v2@7.493,5.588
  Top Layer w0.3: R6.2 29.963,6.096 v2(30.607,6.096) 31.069,6.096 R204.2 ; R6.2 R5.2 29.709,9.516 R7.2@29.718,9.525 ; R7.2@29.718,9.652 R3.2 ; R2.2 R3.2@31.42,9.601
  Bottom Layer w0.3: v2(7.493,5.715) 8.255,5.715 12.827,1.143 27.051,1.143 30.607,4.699 v2(30.607,6.096)
TSP_RESET: FPC1.26 FPC2.12 U2.47 U4.6 | length 136.3
  Top Layer w0.127: U2.47 7.731,6.239 8.001,5.969
  Top Layer w0.254: 8.001,5.969 8.001,3.175 8.382,2.794 23.114,2.794 25.019,4.699 34.036,4.699 36.068,2.667 48.641,2.667 51.308,5.334 51.308,34.29 48.26,37.338 v2(45.593,37.338) 45.573,37.358 44.255,37.358 FPC2.12 ; FPC1.26 12.556,40.877 16.002,44.323 16.002,46.863 17.653,48.514 30.607,48.514 33.528,45.593 v2(33.528,43.815) 33.909,43.815 37.211,40.513 v2(40.259,40.513) ; v2(31.242,42.672) 31.242,42.627 31.436,42.433 U4.6
  Bottom Layer w0.254: v2(31.242,42.672) 32.385,42.672 v2(33.528,43.815) ; v2(40.259,40.513) 43.434,37.338 v2(45.593,37.338)
VDD_LCD_5V: C1.2 C7.2 FPC1.28 FPC1.29 FPC1.30 FPC2.1 FPC2.2 FPC2.3 U1.3 U4.1 U4.2 U5.1 U5.4 | length 19.3
  Top Layer w0.5: U5.1 40.85,15.65 42.1,16.9 42.75,16.9 ; U1.3 44.65,6.161 44.7,6.111 44.7,5.876 45.115,5.461 C1.2 47.117,5.461 48.26,6.604 48.26,15.04 46.3,17
  other v3: 44.45,16.129 45.212,16.129 45.974,16.129 44.45,16.891 45.212,16.891 45.974,16.891 35.052,40.513 35.814,40.513 34.671,41.021 35.306,41.148 34.671,41.656 45.974,41.91 46.609,41.91 45.593,42.545 46.228,42.545 46.863,42.545 33.782,42.672 45.593,43.18 46.228,43.18 46.863,43.18 12.7,43.942 13.462,43.942 14.097,43.942 12.7,44.704 13.462,44.704 14.097,44.704 12.7,45.466 13.462,45.466 14.097,45.466
pads on no net: FPC1.17 FPC1.18 FPC1.19 FPC1.22 FPC2.4 FPC2.5 FPC2.13 FPC2.14 U2.21 U2.23 U2.27 U2.28 U2.30 U2.31 U2.32 U2.33 U2.34 U2.35 U2.36 U2.40 U2.44 U4.7

## Polygon pours and split planes (outlines as drawn)
VDD_LCD_5V on Top Layer "VDD_LCD_5V" (solid, pour order 22): 42.5,20.3 41.9,19.7 41.9,17.6 43.9,15.6 46.4,15.6 47.1,16.3 47.1,17.3 44.1,20.3
GND on Top Layer "GND_L01_P021" (solid, remove dead copper, pour order 21): 0,0 0,50.038 54.991,50.038 54.991,0 53.975,0
ELVSS on Top Layer "ELVSS_L01_P010" (solid, pour order 10): 11.303,7.493 10.668,7.493 8.255,9.906 7.493,9.906 7.366,9.779 7.366,9.017 7.62,8.763 7.874,8.763 10.541,6.096 11.619,6.096 11.811,6.288
NetL2_2 on Top Layer "NETL2_2_L01_P017" (solid, pour order 17): 18.542,15.875 18.542,12.065 17.653,11.176 17.399,11.176 17.399,12.192 17.78,12.573 17.78,13.208 17.272,13.716 17.272,15.748 17.399,15.875 18.288,15.875
ELVDD on Top Layer "ELVDD_L01_P014" (solid, pour order 14): 13.843,14.732 16.51,14.732 16.764,14.478 16.764,12.573 16.637,12.446 16.637,11.049 15.875,11.049 15.875,12.192 15.621,12.446 14.859,12.446 13.716,13.589 13.716,14.605
ELVDD on Top Layer "ELVDD_L01_P012" (solid, pour order 12): 7.493,8.509 7.366,8.382 7.366,7.62 7.874,7.112 8.509,7.112 8.763,7.366 8.763,7.62 7.874,8.509
ELVSS on Top Layer "ELVSS_L01_P009" (solid, pour order 9): 16.383,9.017 16.383,8.128 15.748,7.493 11.303,7.493 10.541,6.731 10.541,6.096 11.049,5.588 15.748,5.588 16.256,6.096 16.256,7.112 16.637,7.493 16.637,9.017
NetL3_1 on Top Layer "NETL3_1_L01_P008" (solid, pour order 8): 16.891,9.017 16.891,7.493 16.51,7.112 16.51,5.715 16.637,5.588 18.542,5.588 18.923,5.969 18.923,6.985 18.669,7.239 17.907,7.239 17.145,8.001 17.145,9.017
TSP_AVDD_3.3V on Top Layer "TSP_AVDD_3.3V_L01_P007" (solid, pour order 7): 17.399,9.017 17.399,8.128 18.034,7.493 18.796,7.493 19.431,6.858 19.431,5.08 19.812,4.699 20.828,4.699 20.955,4.826 20.955,7.62 20.701,7.874 19.685,7.874 19.05,8.509 18.034,8.509 17.526,9.017
TSP_AVDD_3.3V on Top Layer "TSP_AVDD_3.3V_L01_P006" (solid, pour order 6): 19.177,16.637 18.923,16.383 18.923,12.065 17.78,10.922 17.78,10.668 18.669,10.668 19.431,11.43 21.971,11.43 22.479,11.938 22.479,12.827 22.479,14.478 22.225,14.732 20.955,14.732 20.447,15.24 20.447,16.256 20.066,16.637
VDD_LCD_5V on Top Layer "VDD_LCD_5V_L01_P003" (solid, pour order 3): 43.688,43.561 43.307,43.18 43.307,41.91 43.561,41.656 46.609,41.656 47.244,42.291 47.244,43.18 46.863,43.561
VDD_LCD_5V on Top Layer "VDD_LCD_5V_L01_P002" (solid, pour order 2): 33.528,42.545 33.274,42.291 33.274,40.64 33.655,40.259 35.814,40.259 36.068,40.513 36.068,41.148 34.671,42.545
VDD_LCD_5V on Top Layer "VDD_LCD_5V_L01_P000" (solid, pour order 0): 10.795,43.053 10.795,41.783 10.922,41.656 12.7,41.656 14.986,43.942 14.986,45.339 14.351,45.974 12.573,45.974 11.684,45.085 11.684,44.069 10.795,43.18 10.795,42.926
GND on Bottom Layer "GND_L02_P019" (solid, remove dead copper, pour order 19): 0,0 0,50.038 54.991,50.038 54.991,0 53.975,0
ELVDD on Bottom Layer "ELVDD_L02_P015" (solid, pour order 15): 10.16,13.589 7.239,10.668 7.239,7.747 7.874,7.112 8.509,7.112 9.017,7.62 9.017,10.414 11.049,12.446 15.875,12.446 16.129,12.7 16.129,13.335 15.875,13.589
VDD_LCD_5V on Bottom Layer "VDD_LCD_5V_L02_P004" (solid, pour order 4): 47.498,44.323 52.832,38.989 52.832,16.51 50.165,13.843 44.577,13.843 43.434,14.986 43.434,16.764 45.339,18.669 48.895,18.669 50.292,20.066 50.292,37.465 44.958,42.799 44.958,43.688 45.847,44.577
VDD_LCD_5V on Bottom Layer "VDD_LCD_5V_L02_P001" (solid, pour order 1): 12.065,46.355 12.065,43.561 12.446,43.18 14.224,43.18 15.113,44.069 15.113,45.72 16.383,46.99 31.623,46.99 33.909,44.704 33.909,40.64 34.417,40.132 38.608,40.132 39.751,41.275 46.482,41.275 47.498,42.291 47.498,44.323 46.101,45.72 38.1,45.72 34.29,49.53 15.24,49.53

## Keep-outs
Keep-Out Layer:
  lines w0.254: 54.991,3.048 cw(c51.943,3.048) 51.943,0 3.048,0 cw(c3.048,3.048) 0,3.048 0,46.863 cw(c3.137,46.863) 3.137,50 51.854,50 cw(c51.854,46.863) 54.991,46.863 ; 55,3.048 55,46.863

## Silkscreen, mask and mechanical layers (free items; w line width, h text height)
Top Overlay:
  text "正点原子RK系列" at 19.6,47.329 h2.4
  text "野火/鲁班猫系列" at 50.94,44.5 h2.4 r270
  text "香橙派5系列" at 5.251,29.702 h2.4 r90
  text "5.99寸AMOLED驱动板" at 17.5,24.5 h2.6
  text "分辨率：1080x2160" at 17.3,21.9 h2.6
Mechanical 1:
  text "板厚：1mm" at 46.355,1.397 h1.5